# Altium PCB Sensor_Glove-X02.PcbDoc (part 1 of 3)
Units mil, origin at the board's own origin, x right, y up, seen from the top; angles counter-clockwise.
Board outline 1190 x 1020 mil, 2 copper layers (Top Layer, Bottom Layer), stack 5.556 mil thick; 101 components, 52 nets, 320 pads, 71 vias.
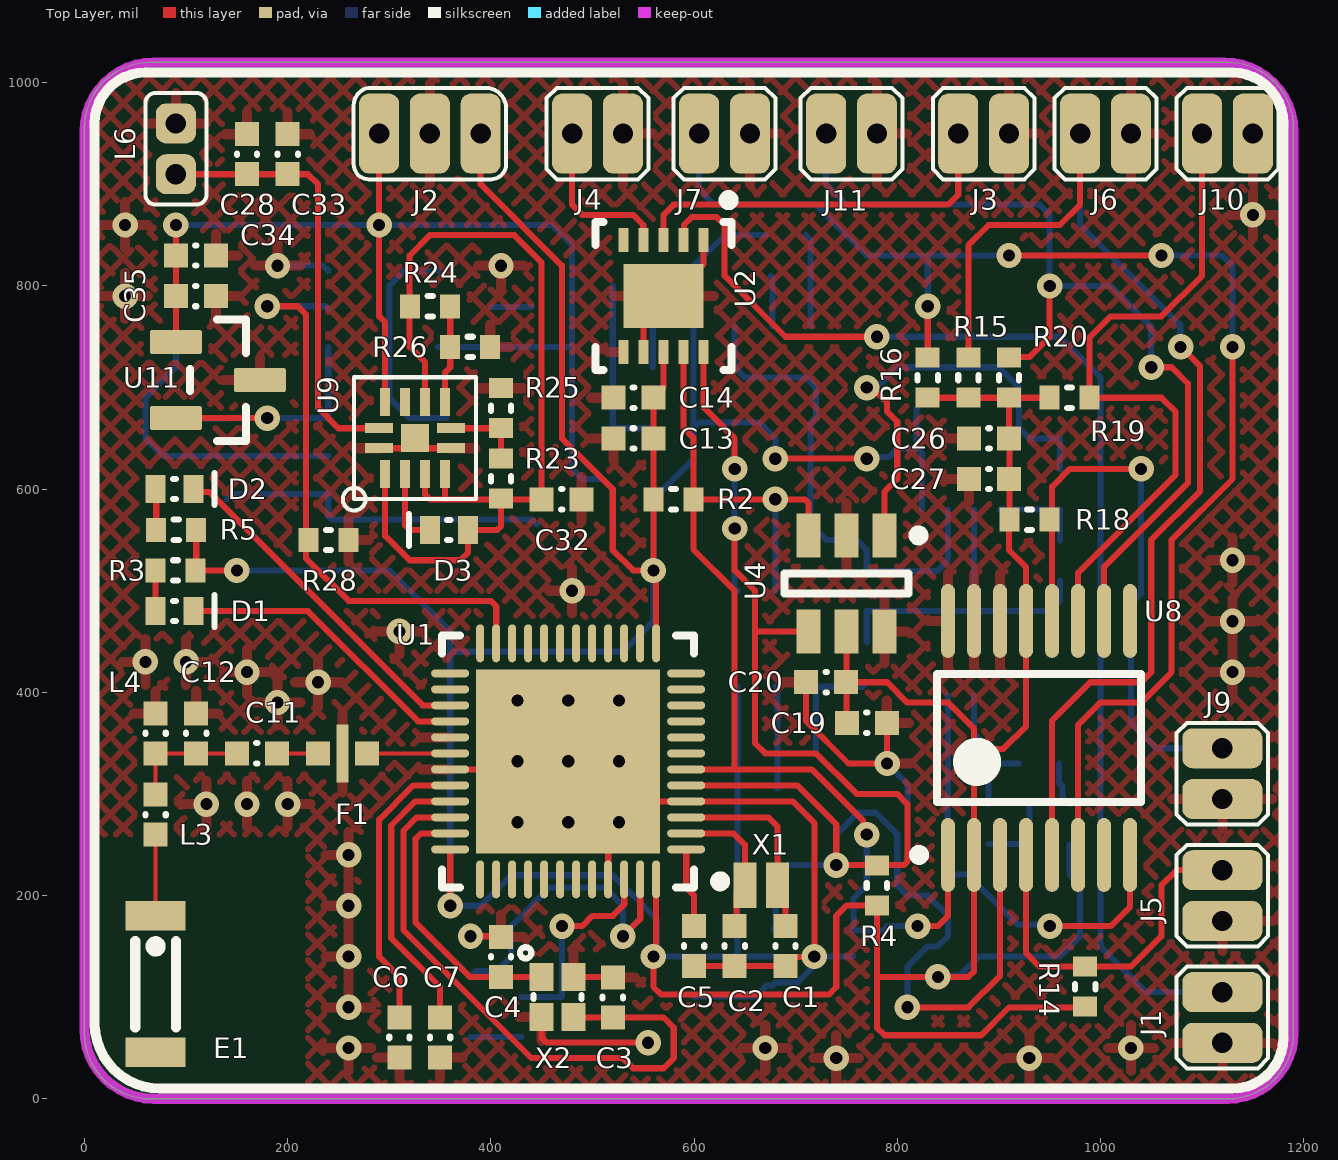
[diagram p0: Top Layer view]
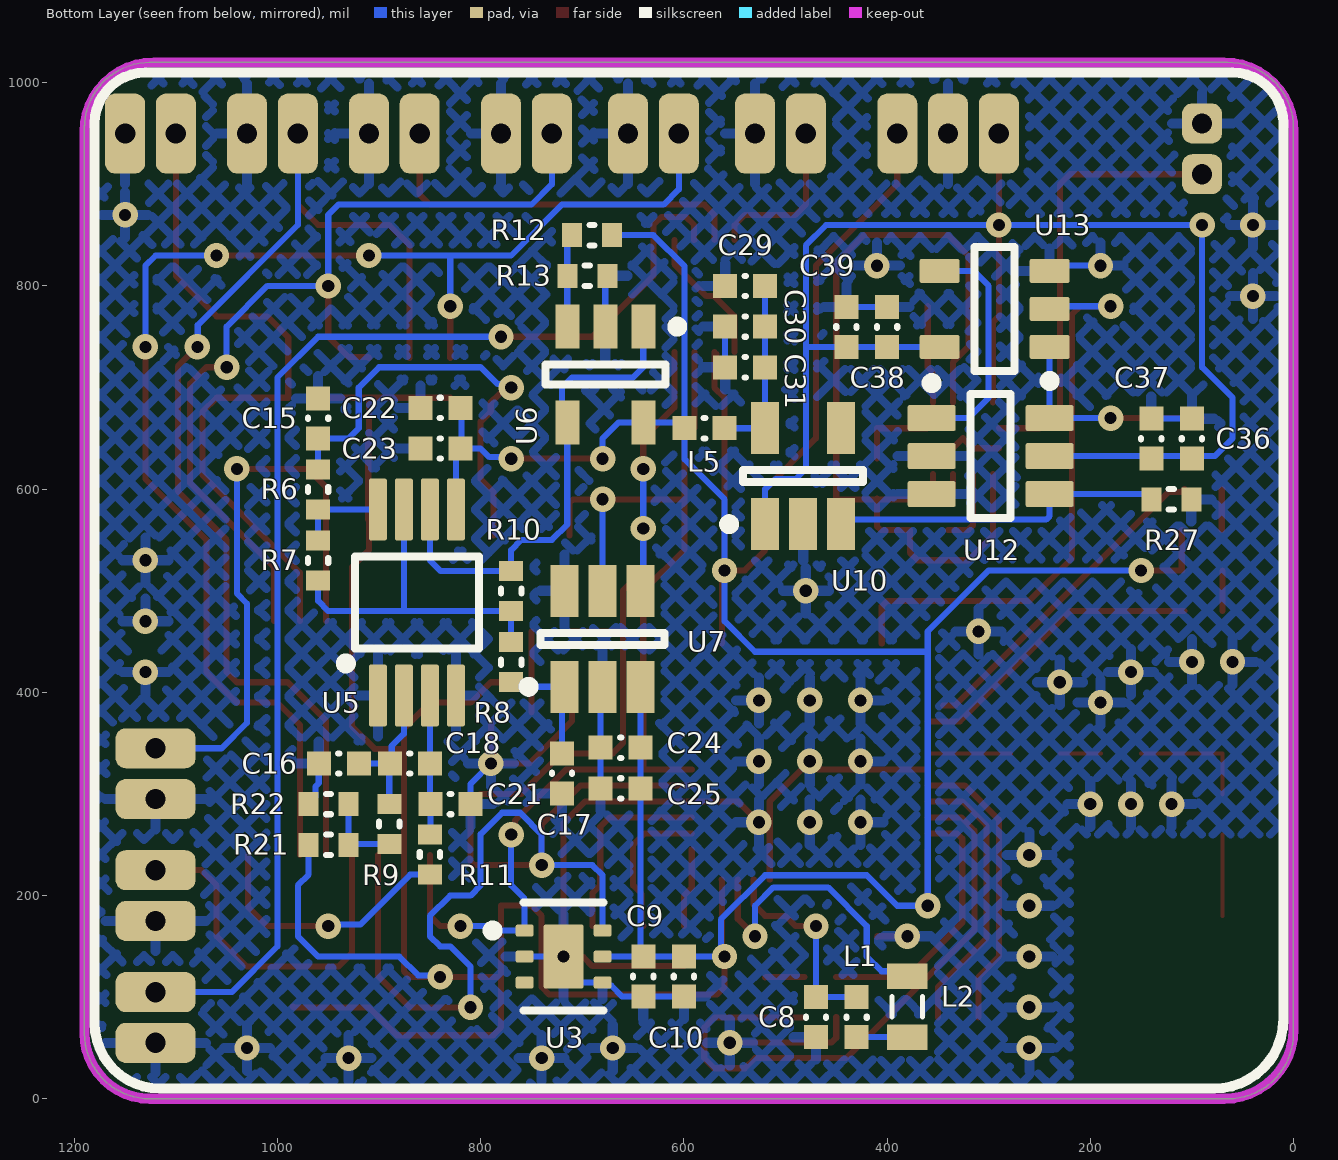
[diagram p1: Bottom Layer view, seen from below]
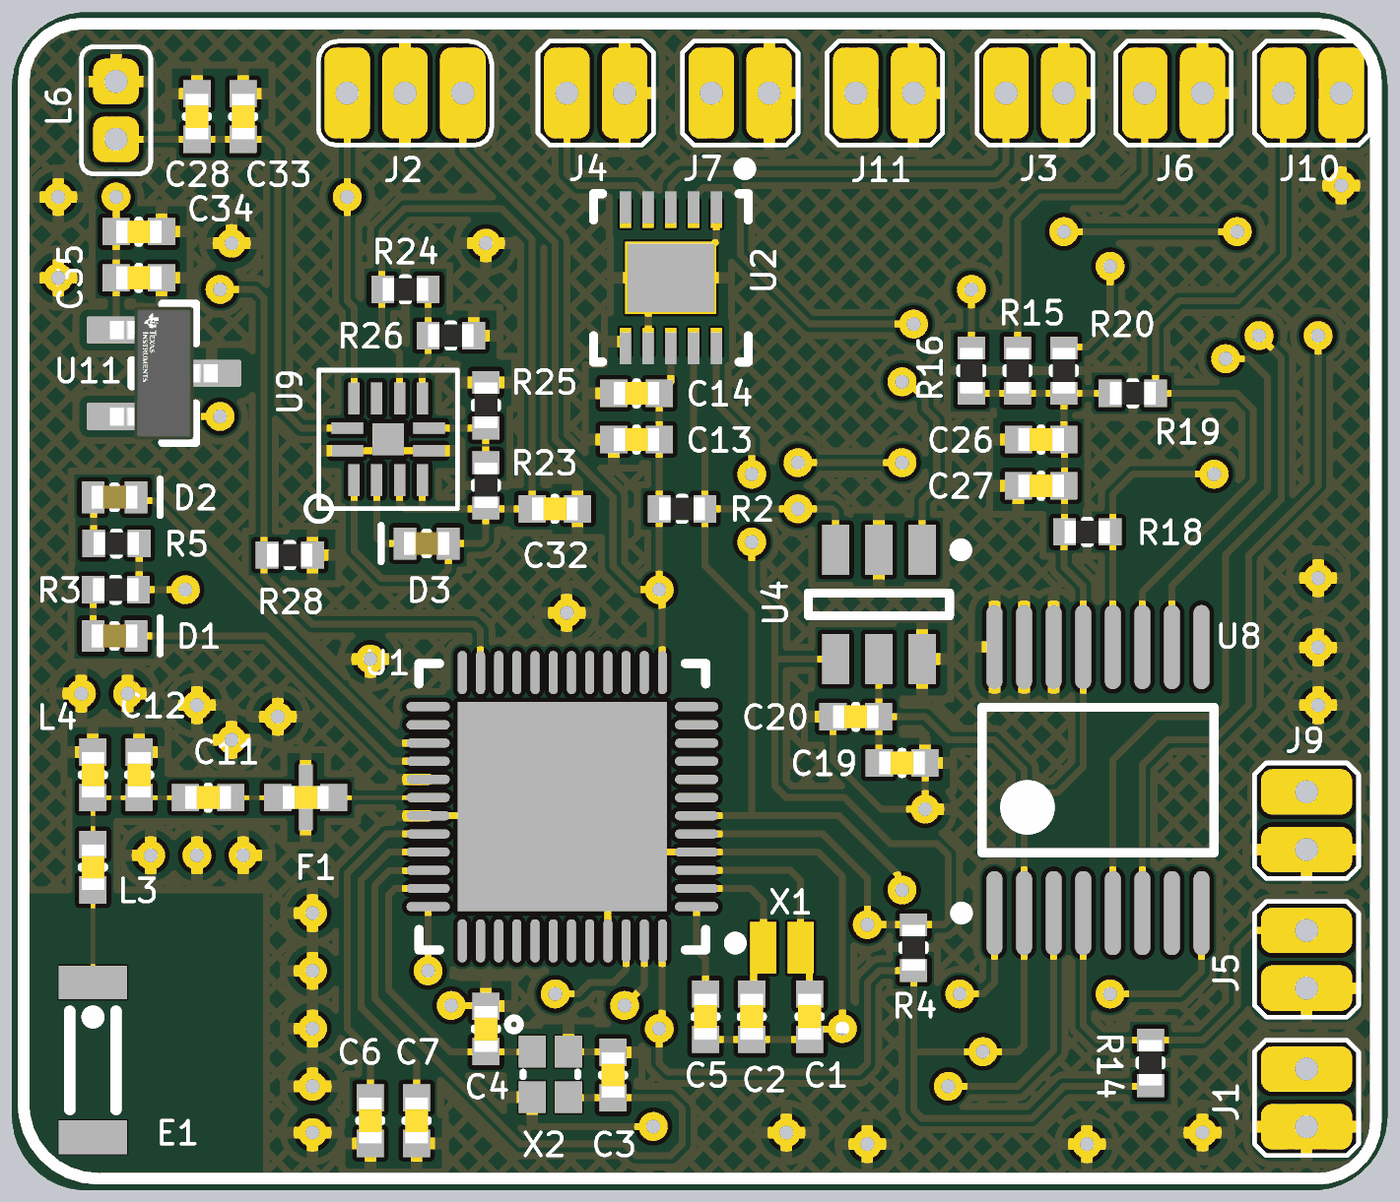
[diagram p2: 3D render of the assembled board from above, using the file's embedded part models]
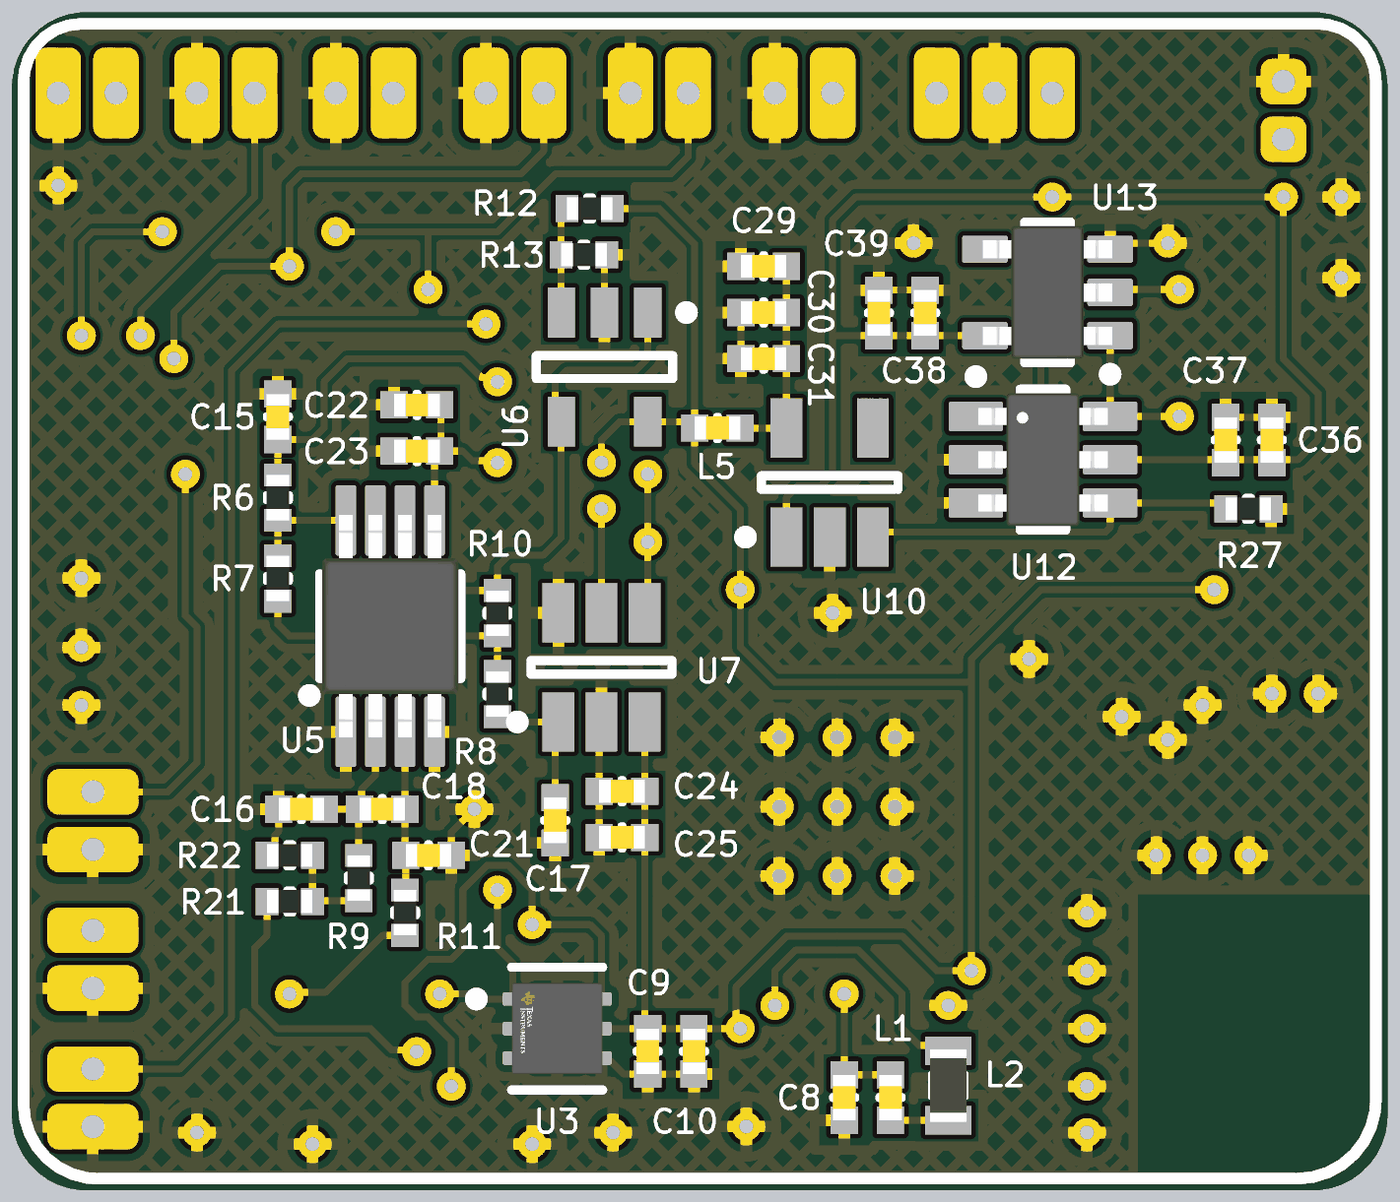
[diagram p3: 3D render of the assembled board from below, using the file's embedded part models]

## Layer stack, top to bottom
Top Solder: solder mask 1, SM-001, Dk 4
Top Layer: signal copper 1.378
Dielectric 2: prepreg 2.8, PP-006, Dk 4.1
Bottom Layer: signal copper 1.378
Bottom Solder: solder mask 1, SM-001, Dk 4

## Board outline
0,64.49 0,955.51 cw(c64.49,955.51) 64.49,1020 1125.51,1020 cw(c1125.51,955.51) 1190,955.51 1190,64.49 cw(c1125.51,64.49) 1125.51,0 64.49,0 cw(c64.49,64.49)

## Design rules (kind name [scope] priority, off if disabled: settings)
Clearance [All] p1: gap=6 ignorepadtopadclearanceinfootprint=FALSE except(4: Arc-Arc Arc-Track Arc-Fill Arc-Poly Arc-Region Track-Track Track-Fill Track-Poly Track-Region Fill-Fill Fill-Poly Fill-Region Poly-Poly Poly-Region Region-Region)
ComponentClearance [All] p1: gap=15 collisioncheckmode=3 verticalgap=0 showdistances=FALSE
HoleSize [All] p1: absolutevalues=TRUE maxlimit=200 minlimit=12 maxpercent=80.000 minpercent=20.000
MinimumSolderMaskSliver [All] p1: minsoldermaskwidth=6
PolygonConnect [All] p1: connectstyle=Relief reliefconductorwidth=10 reliefentries=4 polygonreliefangle="90 Angle" airgapwidth=10
RoutingVias [All] p1: holewidth=16 width=30 viastyle="Through Hole" minholewidth=12 minwidth=12 maxholewidth=100 maxwidth=50
SilkToSilkClearance [All] p1: silktosilkclearance=6
SilkToSolderMaskClearance [IsPad] p1: minsilkscreentomaskgap=6 clearancetoexposedcopper=TRUE
SolderMaskExpansion [All] p1: expansion=4 istentingtop=FALSE
UnRoutedNet [All] p1: checkbadconnections=TRUE
Width [All] p1: maxlimit=50 minlimit=4 preferedwidth=6
24 further rules are at their usual default settings.

## Classes and differential pairs
component class Sensor_Glove_Pheripherals-X02: C13 C14 J1 J3 J4 U2 U3
component class Sensor_Glove_Sensors-X02: C15 C16 C17 C18 C19 C20 C21 C22 C23 C24 C25 C26 C27 J5 J6 J7 J9 J10 J11 R6 R7 R8 R9 R10 R11 R12 R13 R14 R15 R16 R18 R19 R20 R21 R22 U4 U5 U6 U7 U8
component class Sensor_Glove_Power-X02: C28 C29 C30 C31 C32 C33 C34 C35 C36 C37 C38 C39 D3 J2 L5 L6 R23 R24 R25 R26 R27 R28 U9 U10 U11 U12 U13
component class Sensor_Glove_Main-X02: C1 C2 C3 C4 C5 C6 C7 C8 C9 C10 C11 C12 D1 D2 E1 F1 L1 L2 L3 L4 R2 R3 R4 R5 U1 X1 X2

## Components (designator, comment, footprint, x,y, rotation, side; value= is the part's Value field where it differs from the comment)
C1 "14pF" C0402 690,150.31 r90 top
C2 "14pF" C0402 640,150.31 r90 top
C3 "12pF" C0402 520,99.69 r90 top
C4 "12pF" C0402 410,139.69 r90 top
C5 "100nF" C0402 600,150.31 r270 top
C6 "100pF" C0402 310,60.31 r270 top
C7 "100pF" C0402 350,60.31 r270 top
C8 "1uF" C0402 470,80.31 r90 bottom
C9 "4.7uF" C0402 640,120.31 r270 bottom
C10 "100nF" C0402 600,120.31 r90 bottom
C11 "1pF" C0402 169.69,340 r180 top
C12 "" C0402 110,359.69 r90 top
C13 "1uF" C0402 540.32,650 r180 top
C14 "100nF" C0402 540.32,690 r180 top
C15 "100nF" C0402 960,669.68 r90 bottom
C16 "" C0402 939.68,330 r180 bottom
C17 "1uF" C0402 720,320.31 r270 bottom
C18 "100nF" C0402 869.68,330 r180 bottom
C19 "1uF" C0402 770,370 r0 top
C20 "100nF" C0402 730,410 r180 top
C21 "" C0402 829.68,290 r180 bottom
C22 "1uF" C0402 839.68,680 r0 bottom
C23 "100nF" C0402 839.68,640 r0 bottom
C24 "1uF" C0402 662.28,345.51 r0 bottom
C25 "100nF" C0402 662.28,305.51 r0 bottom
C26 "1uF" C0402 890.32,650 r180 top
C27 "100nF" C0402 890.32,610 r180 top
C28 "47nF" C0402 160,929.68 r90 top
C29 "10uF" C0402 539.68,800 r0 bottom
C30 "1uF" C0402 539.68,760 r0 bottom
C31 "100nF" C0402 539.68,720 r180 bottom
C32 "4.7uF" C0402 469.69,590 r0 top
C33 "6.8nF" C0402 200,929.68 r90 top
C34 "1uF" C0402 109.69,830 r0 top
C35 "100nF" C0402 109.69,790 r180 top
C36 "1uF" C0402 100,649.68 r90 bottom
C37 "100nF" C0402 140,649.68 r270 bottom
C38 "1uF" C0402 400,759.68 r90 bottom
C39 "100nF" C0402 440,759.68 r270 bottom
D1 "Orange" LED_0402 88.7,480 r0 top
D2 "Red" LED_0402 88.7,600 r0 top
D3 "Yellow" LED_0402 358.7,560 r180 top
E1 "2450AT18B100" 2450AT18B100 70,180 r270 top
F1 "2450FM07A0029" 2450FM07A0029 254.11,340 r180 top
J1 "Sensor Interconnect Pads" Sensor_Interconnect_Pad 1120,80 r270 top
J2 "SMD CONNECTOR FOR 40 mAh BATTERY" BATTERY_CONNECTOR 340,950 r0 top
J3 "Sensor Interconnect Pads" Sensor_Interconnect_Pad 885,950 r0 top
J4 "Sensor Interconnect Pads" Sensor_Interconnect_Pad 505,950 r0 top
J5 "Sensor Interconnect Pads" Sensor_Interconnect_Pad 1120,200 r90 top
J6 "Sensor Interconnect Pads" Sensor_Interconnect_Pad 1005,950 r180 top
J7 "Sensor Interconnect Pads" Sensor_Interconnect_Pad 630,950 r180 top
J9 "Sensor Interconnect Pads" Sensor_Interconnect_Pad 1120,320 r90 top
J10 "Sensor Interconnect Pads" Sensor_Interconnect_Pad 1125,950 r180 top
J11 "Sensor Interconnect Pads" Sensor_Interconnect_Pad 755,950 r180 top
L1 "15nH" L0402 430,80.31 r270 bottom
L2 "10uH" L0603 380,90.63 r90 bottom
L3 "0.0039uH" L0402 70,279.69 r270 top
L4 "0.0027uH" L0402 70,359.69 r270 top
L5 "1uH" L0402 579.68,660 r0 bottom
L6 "WIRELESS CHARGING COIL, RECEIVER" 760308101219 90,935 r90 top
R2 "3.3kR" R0402 579.68,590 r0 top
R3 "422R" R0402 89.69,520 r180 top
R4 "3.3kR" R0402 780,210 r90 top
R5 "422R" R0402 90.31,560 r180 top
R6 "0mR" R0402 960,599.68 r90 bottom
R7 "" R0402 960,529.68 r90 bottom
R8 "0mR" R0402 770,429.69 r270 bottom
R9 "0mR" R0402 890,270.31 r90 bottom
R10 "" R0402 770,499.69 r270 bottom
R11 "0mR" R0402 850,240.31 r90 bottom
R12 "100kR" R0402 690.32,850 r0 bottom
R13 "100kR" R0402 695.12,810 r180 bottom
R14 "" R0402 985,110.31 r90 top
R15 "" R0402 870,709.68 r90 top
R16 "" R0402 830,709.68 r90 top
R18 "" R0402 930.32,570 r0 top
R19 "" R0402 969.68,690 r0 top
R20 "" R0402 910,709.68 r90 top
R21 "" R0402 949.68,250 r180 bottom
R22 "" R0402 949.68,290 r0 bottom
R23 "0R" R0402 410,610.32 r90 top
R24 "0R" R0402 340.31,780 r180 top
R25 "0R" R0402 410,679.68 r90 top
R26 "0R" R0402 379.69,740 r0 top
R27 "1MR" R0402 120.31,590 r180 bottom
R28 "1MR" R0402 240.31,550 r180 top
U1 "NRF52832-QFAA-R7" NRF52832-QFAA-R7 476.14,332.13 r0 top
U2 "4 CHANNEL CDC" "WSON-10 3X3MM" 570,790 r270 top
U3 "TMP117AIDRVR" TMP117AIDRVR 718.39,140 r270 bottom
U4 "ADS1100A1IDBVT" TI-DBV6_N 750,507.24 r270 top
U5 "Instrumentation Amplifier" 8-MSOP 862.8,488.46 r90 bottom
U6 "AD8505ARJZ-R7" ADI-RJ-5_N 677.4,712.76 r270 bottom
U7 "DAC5571IDBVT" TI-DBV6_M 680,452.76 r90 bottom
U8 "ADG728BRUZ" ADI-RU-16_M 939.57,355.16 r90 top
U9 "LTC4124" 12-LQFN 325.43,650.16 r90 top
U10 "S-1318A30-M5T1U4" SOT-23-5 482.6,612.76 r90 bottom
U11 "DRV5032FBDBZR" FP-DBZ0003A-MFG 131.34,707.4 r0 top
U12 "SN74LVC1G57DBVR" DBV0006A_M 298.07,632.6 r180 bottom
U13 "SN74LVC1G80DBVR" DBV0005A_N 294.13,777.4 r0 bottom
X1 "32.768 kHz" CRYSTAL_1MM2_X_1MM0 666.14,210 r180 top
X2 "32MHz" CRYSTAL_1MM6_X_1MM2 465.75,100.31 r270 top

## Footprints (in the part's own frame and the unit in brackets; to place one, negate y for a bottom-side part, rotate by r counter-clockwise, add the part's x,y. Pads: shape width x height; smd on the part's side, far side on the other; paste and mask are expansions set on the pad)
8-MSOP [mm] "TSOP, 8-Leads, Body 3.1x3.1mm, Pitch 0.65mm, IPC Low Density"
  rrect22% 1.55x0.45 smd: 1(-2.325,0.975) 2(-2.325,0.325) 3(-2.325,-0.325) 4(-2.325,-0.975) 5(2.325,-0.975) 6(2.325,-0.325) 7(2.325,0.325) 8(2.325,0.975)
  silkscreen extent -1.65,-1.55 1.15,1.9, body extent -2.45,-1.5 2.45,1.5, height 0.94
12-LQFN [mm] "12-LQFN Exposed Pad"
  rect 0.7x0.25 smd: 1(-0.9,0.75) 2(-0.9,0.25) 3(-0.9,-0.25) 4(-0.9,-0.75) 7(0.9,-0.75) 8(0.9,-0.25) 9(0.9,0.25) 10(0.9,0.75)
  rect 0.25x0.7 smd: 5(-0.25,-0.9) 6(0.25,-0.9) 11(0.25,0.9) 12(-0.25,0.9)
  rect 0.7x0.7 smd: 13(0,0)
  silkscreen extent -1.81,-1.52 1.52,1.81, body extent -1.02,-1.02 1.02,1.02, height 0.25
2450AT18B100 [mm] "2.4GHz Mini Antenna SMD, 50 ohm Resistence"
  rect 0.74x1.5 smd mask+0.03: 1(0,0) 2(3.406,0)
  silkscreen extent 0.63,-0.51 2.79,0.51, body extent -0.05,-0.9 3.35,0.9, height 1.4
2450FM07A0029 [mm] "Ultra Miniature 2.45 GHz Impedance Matched Low Pass Filter for nRF52832"
  rect 0.6x0.6 smd: 1(-0.613,0) 2(0.613,0)
  rect 0.3x1.45 smd: 3(0,0)
  body extent -0.5,-0.25 0.5,0.25, height 0.55
760308101219 [mm] "WE-WPCC WIRELESS POWER TRANSFER RECEIVER COIL"
  rrect50% 1x1 hole 0.508: 1(-0.635,0) 2(0.635,0)
  silkscreen extent -1.4,-0.76 1.4,0.76
ADI-RJ-5_N [mm] "SOT-23, 5-Leads, Body 2.9x1.6mm, Pitch 0.95mm, IPC Medium Density"
  rect 1.1x0.6 smd: 1(-1.2,0.95) 2(-1.2,0) 3(-1.2,-0.95) 4(1.2,-0.95) 5(1.2,0.95)
  silkscreen extent -1.32,-1.5 0.25,1.92, body extent -0.85,-1.5 0.85,1.5, height 1.45
ADI-RU-16_M [mm] "SOP, 16-Leads, Body 5x4.4mm, Pitch 0.65mm, IPC Low Density"
  oval 1.85x0.35 smd: 1(-2.925,2.275) 2(-2.925,1.625) 3(-2.925,0.975) 4(-2.925,0.325) 5(-2.925,-0.325) 6(-2.925,-0.975) 7(-2.925,-1.625) 8(-2.925,-2.275) 9(2.925,-2.275) 10(2.925,-1.625) 11(2.925,-0.975) 12(2.925,-0.325) 13(2.925,0.325) 14(2.925,0.975) 15(2.925,1.625) 16(2.925,2.275)
  silkscreen extent -3.05,-2.55 1.6,3.12, body extent -2.25,-2.55 2.25,2.55, height 1.2
BATTERY_CONNECTOR [mm] "SMD Battery connector"
  rrect50% 1x2 hole 0.508: 1(-1.27,0) 2(0,0) 3(1.27,0)
  silkscreen extent -1.91,-1.14 1.91,1.14
C0402 [mm]
  rect 0.6x0.6 smd: 1(-0.5,0) 2(0.5,0)
  silkscreen extent -0.02,-0.25 0.02,0.25, body extent -0.5,-0.25 0.5,0.25, height 0.55
CRYSTAL_1MM2_X_1MM0 [mm] "Crystal 1.2 x 1.0 x 0.35mm"
  rect 0.575x1.14 smd paste-0.5 mask+0.06: 1(-0.41,0) 2(0.41,0)
  body extent -0.6,-0.5 0.6,0.5, height 0.35
CRYSTAL_1MM6_X_1MM2 [mm] "1.6 x 1.2 x 0.35mm 4-pin crystal"
  rect 0.7x0.6 smd mask+0.036: 1(-0.5,-0.4) 2(0.5,-0.4) 3(0.5,0.4) 4(-0.5,0.4)
  silkscreen extent -1.24,-0.94 0.05,0.6, body extent -0.8,-0.6 0.8,0.6, height 0.35
DBV0005A_N [mm] "SOT23, 5-Leads, Body 3.05x1.75mm, Pitch 0.95mm, IPC Medium Density"
  rrect17% 1x0.6 smd: 1(-1.375,0.95) 2(-1.375,0) 3(-1.375,-0.95) 4(1.375,-0.95) 5(1.375,0.95)
  silkscreen extent -1.5,-1.55 0.5,1.92, body extent -1.42,-1.46 1.42,1.46, height 1.08
DBV0006A_M [mm] "SOT23, 6-Leads, Body 3.05x1.75mm, Pitch 0.95mm, IPC Low Density"
  rrect15% 1.2x0.65 smd: 1(-1.475,0.95) 2(-1.475,0) 3(-1.475,-0.95) 4(1.475,-0.95) 5(1.475,0) 6(1.475,0.95)
  silkscreen extent -1.6,-1.55 0.5,1.95, body extent -1.42,-1.46 1.42,1.46, height 1.11
FP-DBZ0003A-MFG [mm]
  rrect17% 1.3x0.6 smd paste+0 mask+0: 1(-1.05,0.95) 2(-1.05,-0.95) 3(1.05,0)
  silkscreen extent -0.7,-1.52 0.7,1.52, body extent -1.8,-1.62 1.8,1.62, height 0.25
L0402 [mm]
  rect 0.6x0.6 smd: 1(-0.5,0) 2(0.5,0)
  silkscreen extent -0.02,-0.25 0.02,0.25, body extent -0.5,-0.25 0.5,0.25, height 0.55
L0603 [mil] "surface mount inductor 0603"
  rect 25x40 smd: 1(-30,0) 2(30,0)
  silkscreen extent -10,-15 10,15, body extent -31,-16 32,16, height 39
LED_0402 [mm] "0402 w/ LED mark"
  rect 0.5x0.7 smd: A(-0.475,0) K(0.475,0)
  silkscreen extent -0.04,-0.4 1,0.4, body extent -0.5,-0.25 0.5,0.25, height 0.35
NRF52832-QFAA-R7 [mm]
  oval 0.95x0.2 smd: 1(2.95,-2.2) 2(2.95,-1.8) 3(2.95,-1.4) 4(2.95,-1) 5(2.95,-0.6) 6(2.95,-0.2) 7(2.95,0.2) 8(2.95,0.6) 9(2.95,1) 10(2.95,1.4) 11(2.95,1.8) 12(2.95,2.2) 25(-2.95,2.2) 26(-2.95,1.8) 27(-2.95,1.4) 28(-2.95,1) 29(-2.95,0.6) 30(-2.95,0.2) 31(-2.95,-0.2) 32(-2.95,-0.6) 33(-2.95,-1) 34(-2.95,-1.4) 35(-2.95,-1.8) 36(-2.95,-2.2)
  oval 0.2x0.95 smd: 13(2.2,2.95) 14(1.8,2.95) 15(1.4,2.95) 16(1,2.95) 17(0.6,2.95) 18(0.2,2.95) 19(-0.2,2.95) 20(-0.6,2.95) 21(-1,2.95) 22(-1.4,2.95) 23(-1.8,2.95) 24(-2.2,2.95) 37(-2.2,-2.95) 38(-1.8,-2.95) 39(-1.4,-2.95) 40(-1,-2.95) 41(-0.6,-2.95) 42(-0.2,-2.95) 43(0.2,-2.95) 44(0.6,-2.95) 45(1,-2.95) 46(1.4,-2.95) 47(1.8,-2.95) 48(2.2,-2.95)
  rect 4.6x4.6 smd: 49(0,0)
  silkscreen extent -3.15,-3.15 3.92,3.15, body extent -3,-3 3,3, height 0.9
R0402 [mm]
  rect 0.5x0.6 smd: 1(-0.5,0) 2(0.5,0)
  silkscreen extent -0.06,-0.25 0.06,0.25, body extent -0.5,-0.25 0.5,0.25, height 0.35
Sensor_Interconnect_Pad [mm] "Solder PAD for sensor interconnects"
  rrect50% 1x2 hole 0.508: 1(-0.635,0) 2(0.635,0)
  silkscreen extent -1.27,-1.14 1.27,1.14
SOT-23-5 [mm] "SOT23, 5-Leads, Body 2.9x1.6mm, Pitch 0.95mm, Lead Span 2.8mm, IPC Low Density"
  rect 1.3x0.7 smd: 1(-1.2,0.95) 2(-1.2,0) 3(-1.2,-0.95) 4(1.2,-0.95) 5(1.2,0.95)
  silkscreen extent -1.32,-1.5 0.15,1.98, body extent -0.83,-1.49 0.83,1.5, height 1.19
TI-DBV6_M [mm] "SOT23, 6-Leads, Body 2.9x1.6mm, Pitch 0.95mm, IPC Low Density"
  rect 1.3x0.7 smd: 1(-1.2,0.95) 2(-1.2,0) 3(-1.2,-0.95) 4(1.2,-0.95) 5(1.2,0) 6(1.2,0.95)
  silkscreen extent -1.32,-1.55 0.15,1.98, body extent -0.87,-1.52 0.87,1.53, height 1.45
TI-DBV6_N [mm] "SOT23, 6-Leads, Body 2.9x1.6mm, Pitch 0.95mm, IPC Medium Density"
  rect 1.1x0.6 smd: 1(-1.2,0.95) 2(-1.2,0) 3(-1.2,-0.95) 4(1.2,-0.95) 5(1.2,0) 6(1.2,0.95)
  silkscreen extent -1.32,-1.55 0.25,1.93, body extent -0.87,-1.52 0.87,1.53, height 1.45
TMP117AIDRVR [mm]
  rrect33% 0.3x0.45 smd paste+0 mask+0: 1(-0.65,-0.975) 2(0,-0.975) 3(0.65,-0.975) 4(0.65,0.975) 5(0,0.975) 6(-0.65,0.975)
  rrect10% 1.6x1 smd paste-1000 mask+0: 7(0,0)
  silkscreen extent -1.35,-1.9 1.35,1, body extent -1,-1 1,1, height 0.8
"WSON-10 3X3MM" [mm] "SON, 10-Leads, Body 3x3 mm, Pitch 0.5mm"
  rect 0.6x0.25 smd paste-0.125 mask+0.051: 1(-1.4,1) 2(-1.4,0.5) 3(-1.4,0) 4(-1.4,-0.5) 5(-1.4,-1) 6(1.4,-1) 7(1.4,-0.5) 8(1.4,0) 9(1.4,0.5) 10(1.4,1)
  rect 1.6x2 smd paste-0.05 mask+0.051: 1(0,0)
  silkscreen extent -2.52,-1.7 1.85,1.75, body extent -1.55,-1.55 1.55,1.55, height 0.8

## Part data
C1 C2: library part C-0402(1005), "Ceramic Capacitor, Multilayer, Ceramic, 50V, 1% +Tol, 1% -Tol, C0G, 30ppm/Cel TC, 0.000014uF, Surface Mount, 0402", Case Code (Imperial)=0402, Case Code (Metric)=1005, Dielectric=C0G, Manufacturer="Kyocera AVX", Manufacturer Part Number=04025U140FAT2A, Max Operating Temperature=125°C, Min Operating Temperature=-55°C, Package Quantity=10000, Supplier Part Number 1=478-10139-1-ND, Tolerance=1%, Voltage Rating=50V, Capacitance=14pF, Case/Package=0402, Category="Ceramic Capacitors", ComponentLink1Description=https://datasheet.ciiva.com/169/product-169683.pdf, ComponentLink1URL=https://datasheet.ciiva.com/169/product-169683.pdf, ComponentLink2Description=https://datasheet.ciiva.com:443/pdfs/VipMasterIC/IC/AVXC/AVXC-S-A0001948465/AVXC-S-A0001948465-1.pdf?src-supplier=IHS+Markit, ComponentLink2URL=https://datasheet.ciiva.com:443/pdfs/VipMasterIC/IC/AVXC/AVXC-S-A0001948465/AVXC-S-A0001948465-1.pdf?src-supplier=IHS+Markit, ComponentLink3Description=https://datasheet.ciiva.com/6269/useries-6269558.pdf?src-supplier=Digi-Key, ComponentLink3URL=https://datasheet.ciiva.com/6269/useries-6269558.pdf?src-supplier=Digi-Key, ComponentLink4Description=https://datasheet.ciiva.com/11568/useries-11568551.pdf?src-supplier=Avnet, ComponentLink4URL=https://datasheet.ciiva.com/11568/useries-11568551.pdf?src-supplier=Avnet, Composition=Ceramic, Depth=0.5mm, Length=1mm, Mount="Surface Mount", Packaging="Tape and Reel", Pricing 1="1=0.35000, 10=0.24100, 100=0.14460, 500=0.10846, 1000=0.09158, 2500=0.08676, 5000=0.08194 (USD)", Radiation Hardening=No, RoHS=Yes, Stock 1=25036, Supplier 1=Digi-Key, Termination=SMD/SMT, Thickness=0.022inch, Voltage Rating (DC)=50V, Width=0.5mm
C3 C4: library part C-0402(1005), "Ceramic Capacitor, Multilayer, Ceramic, 50V, 1% +Tol, 1% -Tol, C0G, 30ppm/Cel TC, 0.000012uF, Surface Mount, 0402", Case Code (Imperial)=0402, Case Code (Metric)=1005, Dielectric=C0G, Manufacturer="Kyocera AVX", Manufacturer Part Number=04025U120FAT2A, Max Operating Temperature=125°C, Min Operating Temperature=-55°C, Package Quantity=10000, Supplier Part Number 1=478-10136-1-ND, Tolerance=1%, Voltage Rating=50V, Capacitance=12pF, Case/Package=0402, Category="Ceramic Capacitors", ComponentLink1Description=https://datasheet.ciiva.com/169/product-169683.pdf, ComponentLink1URL=https://datasheet.ciiva.com/169/product-169683.pdf, ComponentLink2Description=https://datasheet.ciiva.com:443/pdfs/VipMasterIC/IC/AVXC/AVXC-S-A0008668660/AVXC-S-A0008668660-1.pdf?src-supplier=IHS+Markit, ComponentLink2URL=https://datasheet.ciiva.com:443/pdfs/VipMasterIC/IC/AVXC/AVXC-S-A0008668660/AVXC-S-A0008668660-1.pdf?src-supplier=IHS+Markit, ComponentLink3Description=https://datasheet.ciiva.com/16327/useries-16327642.pdf?src-supplier=Future+Electronics, ComponentLink3URL=https://datasheet.ciiva.com/16327/useries-16327642.pdf?src-supplier=Future+Electronics, ComponentLink4Description=https://datasheet.ciiva.com/11568/useries-11568940.pdf?src-supplier=Avnet, ComponentLink4URL=https://datasheet.ciiva.com/11568/useries-11568940.pdf?src-supplier=Avnet, Composition=Ceramic, Depth=0.5mm, Height=0.02mm, Lead Free="Lead Free", Length=1mm, Mount="Surface Mount", Packaging="Tape and Reel", Pricing 1="1=0.33000, 10=0.22700, 100=0.13630, 500=0.10220, 1000=0.08630, 2500=0.08176, 5000=0.07721 (USD)", Radiation Hardening=No, RoHS=Yes, Stock 1=30880, Supplier 1=Digi-Key, Termination=SMD/SMT, Thickness=0.022inch, Voltage Rating (DC)=50V, Weight=2.3E-05oz, Width=0.02inch
C5 C31 C35 C37 C39: library part C-0402(1005), "Ceramic Capacitor, Multilayer, Ceramic, 25V, 10% +Tol, 10% -Tol, X5R, 15% TC, 0.1uF, Surface Mount, 0402", Case Code (Imperial)=0402, Case Code (Metric)=1005, Dielectric=X5R, Manufacturer="Taiyo Yuden", Manufacturer Part Number=TMK105BJ104KV-F, Max Operating Temperature=85°C, Min Operating Temperature=-55°C, Package Quantity=1, Supplier Part Number 1=587-1456-1-ND, Tolerance=10%, Voltage=25V, Capacitance=100nF, Case/Package=0402, Category="Ceramic Capacitors", ComponentLink1Description=https://datasheet.ciiva.com/169/product-169683.pdf, ComponentLink1URL=https://datasheet.ciiva.com/169/product-169683.pdf, ComponentLink2Description=https://datasheet.ciiva.com:443/pdfs/VipMasterIC/IC/TAIY/TAIY-S-A0009103435/TAIY-S-A0009103038-1.pdf?src-supplier=IHS+Markit, ComponentLink2URL=https://datasheet.ciiva.com:443/pdfs/VipMasterIC/IC/TAIY/TAIY-S-A0009103435/TAIY-S-A0009103038-1.pdf?src-supplier=IHS+Markit, ComponentLink3Description=https://datasheet.ciiva.com/30051/25tmk105bj104kv-f-30051094.pdf?src-supplier=Onlinecomponents.com, ComponentLink3URL=https://datasheet.ciiva.com/30051/25tmk105bj104kv-f-30051094.pdf?src-supplier=Onlinecomponents.com, ComponentLink4Description=https://datasheet.ciiva.com/15922/28tmk105bj104kv-f-15922315.pdf?src-supplier=Onlinecomponents.com, ComponentLink4URL=https://datasheet.ciiva.com/15922/28tmk105bj104kv-f-15922315.pdf?src-supplier=Onlinecomponents.com, ComponentLink5Description=https://datasheet.ciiva.com/131/tmk105bj104kv-f-ss-131420.pdf?src-supplier=Digi-Key, ComponentLink5URL=https://datasheet.ciiva.com/131/tmk105bj104kv-f-ss-131420.pdf?src-supplier=Digi-Key, ComponentLink6Description=https://datasheet.ciiva.com/22768/1693457-22768649.pdf?src-supplier=Farnell, ComponentLink6URL=https://datasheet.ciiva.com/22768/1693457-22768649.pdf?src-supplier=Farnell, Composition=Ceramic, Depth=0.5mm, Halogen Free="Halogen Free", Height=0.5mm, Lead Free="Lead Free", Length=1mm, Mount="Surface Mount", Number of Pins=2, Packaging="Tape and Reel", Pricing 1="1=0.10000, 10=0.04600, 100=0.02050, 500=0.01464, 1000=0.01150, 2500=0.01045, 5000=0.00961 (USD)", REACH SVHC="No SVHC", RoHS=Yes, Stock 1=27456801, Supplier 1=Digi-Key, Termination=SMD/SMT, Thickness=0.022inch, Voltage Rating=25V, Voltage Rating (DC)=25V, Weight=2.3E-05oz, Width=0.5mm
C6 C7: library part C-0402(1005), "Ceramic Capacitor, Multilayer, Ceramic, 50V, 1% +Tol, 1% -Tol, C0G, 30ppm/Cel TC, 0.0001uF, Surface Mount, 0402", Case Code (Imperial)=0402, Case Code (Metric)=1005, Dielectric=C0G, Manufacturer=Yageo, Manufacturer Part Number=CC0402FRNPO9BN101, Max Operating Temperature=125°C, Min Operating Temperature=-55°C, Package Quantity=10000, Supplier Part Number 1=311-3329-1-ND, Tolerance=1%, Voltage Rating=50V, Capacitance=100pF, Case/Package=0402, Category="Ceramic Capacitors", ComponentLink1Description=https://datasheet.ciiva.com/169/product-169683.pdf, ComponentLink1URL=https://datasheet.ciiva.com/169/product-169683.pdf, ComponentLink2Description=https://datasheet.ciiva.com:443/pdfs/VipMasterIC/IC/YAGO/YAGO-S-A0009251638/YAGO-S-A0009251638-1.pdf?src-supplier=IHS+Markit, ComponentLink2URL=https://datasheet.ciiva.com:443/pdfs/VipMasterIC/IC/YAGO/YAGO-S-A0009251638/YAGO-S-A0009251638-1.pdf?src-supplier=IHS+Markit, ComponentLink3Description=http://www.mouser.com/ds/2/447/Yageo_UPY-GP_NP0_16V-to-50V_9-358835.pdf?src-supplier=Mouser, ComponentLink3URL=http://www.mouser.com/ds/2/447/Yageo_UPY-GP_NP0_16V-to-50V_9-358835.pdf?src-supplier=Mouser, ComponentLink4Description=http://components.arrow.com/part/dataview/0323_00775990?src-supplier=Arrow+Europe, ComponentLink4URL=http://components.arrow.com/part/dataview/0323_00775990?src-supplier=Arrow+Europe, ComponentLink5Description=http://www.yageo.com/NewPortal/yageodocoutput?fileName=/pdf/MLCC/UPY-GP_NP0_16V-to-50V_14.pdf&src-supplier=Digi-Key, ComponentLink5URL=http://www.yageo.com/NewPortal/yageodocoutput?fileName=/pdf/MLCC/UPY-GP_NP0_16V-to-50V_14.pdf&src-supplier=Digi-Key, ComponentLink6Description=http://www.yageo.com/documents/recent/UPY-GP_NP0_16V-to-50V_16.pdf?src-supplier=Digi-Key, ComponentLink6URL=http://www.yageo.com/documents/recent/UPY-GP_NP0_16V-to-50V_16.pdf?src-supplier=Digi-Key, ComponentLink7Description=http://www.yageo.com/documents/recent/UPY-GP_NP0_16V-to-50V_9.pdf?src-supplier=Future+Electronics, ComponentLink7URL=http://www.yageo.com/documents/recent/UPY-GP_NP0_16V-to-50V_9.pdf?src-supplier=Future+Electronics, Composition=Ceramic, Depth=0.5mm, Lead Free="Lead Free", Length=1mm, Mount="Surface Mount", Packaging="Tape and Reel", Pricing 1="1=0.11000, 10=0.08200, 100=0.03840, 500=0.02690, 1000=0.02228, 2500=0.02073, 5000=0.01897 (USD)", RoHS=Yes, Stock 1=22812, Supplier 1=Digi-Key, Termination=SMD/SMT, Thickness=0.022inch, Voltage Rating (DC)=50V, Width=0.02inch
C8 C30 C34 C36 C38: library part C-0402(1005), "Ceramic Capacitor, Multilayer, Ceramic, 6.3V, 20% +Tol, 20% -Tol, X5R, 15% TC, 1uF, Surface Mount, 0402", Case Code (Imperial)=0402, Case Code (Metric)=1005, Dielectric=X5R, Manufacturer=Yageo, Manufacturer Part Number=CC0402MRX5R5BB105, Max Operating Temperature=85°C, Min Operating Temperature=-55°C, Package Quantity=1, Supplier Part Number 1=311-1441-1-ND, Tolerance=20%, Voltage Rating=6.3V, Capacitance=1uF, Case/Package=0402, Category="Ceramic Capacitors", ComponentLink1Description=https://datasheet.ciiva.com/169/product-169683.pdf, ComponentLink1URL=https://datasheet.ciiva.com/169/product-169683.pdf, ComponentLink2Description=https://datasheet.ciiva.com:443/pdfs/VipMasterIC/IC/YAGO/YAGO-S-A0006851646/YAGO-S-A0006851646-1.pdf?src-supplier=IHS+Markit, ComponentLink2URL=https://datasheet.ciiva.com:443/pdfs/VipMasterIC/IC/YAGO/YAGO-S-A0006851646/YAGO-S-A0006851646-1.pdf?src-supplier=IHS+Markit, ComponentLink3Description=https://datasheet.ciiva.com/176/mlccorderingcode-176806.pdf?src-supplier=Digi-Key, ComponentLink3URL=https://datasheet.ciiva.com/176/mlccorderingcode-176806.pdf?src-supplier=Digi-Key, ComponentLink4Description=https://datasheet.ciiva.com/176/mlccorderingcode-176807.pdf?src-supplier=Digi-Key, ComponentLink4URL=https://datasheet.ciiva.com/176/mlccorderingcode-176807.pdf?src-supplier=Digi-Key, ComponentLink5Description=https://datasheet.ciiva.com/176/mlccorderingcode-176808.pdf?src-supplier=Digi-Key, ComponentLink5URL=https://datasheet.ciiva.com/176/mlccorderingcode-176808.pdf?src-supplier=Digi-Key, Composition=Ceramic, Depth=0.5mm, Dissipation Factor=10%, Halogen Free="Halogen Free", Height=0.5mm, Lead Free="Lead Free", Length=1mm, Mount="Surface Mount", Number of Pins=2, Packaging="Tape and Reel", Pricing 1="1=0.13000, 10=0.08900, 100=0.04200, 500=0.02946, 1000=0.02439, 2500=0.02270, 5000=0.02076 (USD)", RoHS=Yes, Stock 1=16697, Supplier 1=Digi-Key, Termination=SMD/SMT, Thickness=0.022inch, Voltage Rating (DC)=6.3V, Width=0.5mm
C9: library part C-0402(1005), "0402 10 V 4.7 uF ±20% Tolerance X5R Multilayer Ceramic Chip Capacitor", Case Code (Imperial)=0402, Case Code (Metric)=1005, Manufacturer=Murata, Manufacturer Part Number=GRM155R61A475MEAAD, Max Operating Temperature=85°C, Min Operating Temperature=-55°C, Supplier Part Number 1=490-14306-1-ND, Tolerance=20%, Voltage Rating=10V, Capacitance=4.7uF, Case/Package=0402, Category="Ceramic Capacitors", ComponentLink1Description=https://datasheet.ciiva.com/169/product-169683.pdf, ComponentLink1URL=https://datasheet.ciiva.com/169/product-169683.pdf, ComponentLink2Description=https://psearch.en.murata.com:443/capacitor/product/GRM155R61A475MEAA%23.pdf?src-supplier=IHS+Markit, ComponentLink2URL=https://psearch.en.murata.com:443/capacitor/product/GRM155R61A475MEAA%23.pdf?src-supplier=IHS+Markit, ComponentLink3Description=http://www.farnell.com/datasheets/2189109.pdf?src-supplier=Farnell, ComponentLink3URL=http://www.farnell.com/datasheets/2189109.pdf?src-supplier=Farnell, ComponentLink4Description=https://search.murata.co.jp/Ceramy/image/img/A01X/G101/ENG/GRM155R61A475MEAA-01.pdf?src-supplier=Digi-Key, ComponentLink4URL=https://search.murata.co.jp/Ceramy/image/img/A01X/G101/ENG/GRM155R61A475MEAA-01.pdf?src-supplier=Digi-Key, ComponentLink5Description=http://www.farnell.com/datasheets/2189109.pdf?src-supplier=Element14, ComponentLink5URL=http://www.farnell.com/datasheets/2189109.pdf?src-supplier=Element14, ComponentLink6Description=http://www.farnell.com/datasheets/2189109.pdf?src-supplier=Newark, ComponentLink6URL=http://www.farnell.com/datasheets/2189109.pdf?src-supplier=Newark, ComponentLink7Description=http://datasheet.octopart.com/GRM155R61A475MEAAD-Murata-datasheet-138740730.pdf?src-supplier=Ciiva+Crawler, ComponentLink7URL=http://datasheet.octopart.com/GRM155R61A475MEAAD-Murata-datasheet-138740730.pdf?src-supplier=Ciiva+Crawler, ComponentLink8Description=http://datasheet.octopart.com/GRM155R61A475MEAAD-Murata-datasheet-140690084.pdf?src-supplier=Ciiva+Crawler, ComponentLink8URL=http://datasheet.octopart.com/GRM155R61A475MEAAD-Murata-datasheet-140690084.pdf?src-supplier=Ciiva+Crawler, ComponentLink9Description=http://datasheet.octopart.com/GRM155R61A475MEAAD-Murata-datasheet-68589269.pdf?src-supplier=Newark, ComponentLink9URL=http://datasheet.octopart.com/GRM155R61A475MEAAD-Murata-datasheet-68589269.pdf?src-supplier=Newark, ComponentLink10Description=http://datasheet.octopart.com/GRM155R61A475MEAAD-Murata-datasheet-8819587.pdf, ComponentLink10URL=http://datasheet.octopart.com/GRM155R61A475MEAAD-Murata-datasheet-8819587.pdf, ComponentLink11Description=http://datasheet.octopart.com/GRM155R61A475MEAAD-Murata-datasheet-10025737.pdf, ComponentLink11URL=http://datasheet.octopart.com/GRM155R61A475MEAAD-Murata-datasheet-10025737.pdf, ComponentLink12Description=http://datasheet.octopart.com/GRM155R61A475MEAAD-Murata-datasheet-11978611.pdf, ComponentLink12URL=http://datasheet.octopart.com/GRM155R61A475MEAAD-Murata-datasheet-11978611.pdf, ComponentLink13Description=http://datasheet.octopart.com/GRM155R61A475MEAAD-Murata-datasheet-12510076.pdf, ComponentLink13URL=http://datasheet.octopart.com/GRM155R61A475MEAAD-Murata-datasheet-12510076.pdf, ComponentLink14Description=http://datasheet.octopart.com/GRM155R61A475MEAAD-Murata-datasheet-12515295.pdf, ComponentLink14URL=http://datasheet.octopart.com/GRM155R61A475MEAAD-Murata-datasheet-12515295.pdf, Mount="Surface Mount", Packaging="Tape and Reel", Pricing 1="1=0.25000, 10=0.16900, 100=0.08560, 500=0.05854, 1000=0.05179, 2500=0.04954, 5000=0.04503 (USD)", Stock 1=420733, Supplier 1=Digi-Key
C10 C14 C15 C18 C20 C23 C25 C27: library part C-0402(1005), "Ceramic Capacitor, Multilayer, Ceramic, 25V, 10% +Tol, 10% -Tol, X5R, 15% TC, 0.1uF, Surface Mount, 0402", Case Code (Imperial)=0402, Case Code (Metric)=1005, Dielectric=X5R, Manufacturer="Taiyo Yuden", Manufacturer Part Number=TMK105BJ104KV-F, Max Operating Temperature=85°C, Min Operating Temperature=-55°C, Package Quantity=1, Resistor Type=Ceramic, Supplier Part Number 1=587-1456-1-ND, Tolerance=10%, Voltage=25V, Capacitance=100nF, Case/Package=0402, Category="Ceramic Capacitors", ComponentLink1Description=https://datasheet.ciiva.com/169/product-169683.pdf, ComponentLink1URL=https://datasheet.ciiva.com/169/product-169683.pdf, ComponentLink2Description=https://datasheet.ciiva.com:443/pdfs/VipMasterIC/IC/TAIY/TAIY-S-A0009103435/TAIY-S-A0009103038-1.pdf?src-supplier=IHS+Markit, ComponentLink2URL=https://datasheet.ciiva.com:443/pdfs/VipMasterIC/IC/TAIY/TAIY-S-A0009103435/TAIY-S-A0009103038-1.pdf?src-supplier=IHS+Markit, ComponentLink3Description=https://datasheet.ciiva.com/30051/25tmk105bj104kv-f-30051094.pdf?src-supplier=Onlinecomponents.com, ComponentLink3URL=https://datasheet.ciiva.com/30051/25tmk105bj104kv-f-30051094.pdf?src-supplier=Onlinecomponents.com, ComponentLink4Description=https://datasheet.ciiva.com/15922/28tmk105bj104kv-f-15922315.pdf?src-supplier=Onlinecomponents.com, ComponentLink4URL=https://datasheet.ciiva.com/15922/28tmk105bj104kv-f-15922315.pdf?src-supplier=Onlinecomponents.com, ComponentLink5Description=https://datasheet.ciiva.com/131/tmk105bj104kv-f-ss-131420.pdf?src-supplier=Digi-Key, ComponentLink5URL=https://datasheet.ciiva.com/131/tmk105bj104kv-f-ss-131420.pdf?src-supplier=Digi-Key, ComponentLink6Description=https://datasheet.ciiva.com/22768/1693457-22768649.pdf?src-supplier=Farnell, ComponentLink6URL=https://datasheet.ciiva.com/22768/1693457-22768649.pdf?src-supplier=Farnell, Depth=0.5mm, Halogen Free="Halogen Free", Height=0.5mm, Lead Free="Lead Free", Length=1mm, Mount="Surface Mount", Number of Pins=2, Packaging="Tape and Reel", REACH SVHC="No SVHC", RoHS=Yes, Supplier 1=Digi-Key, Termination=SMD/SMT, Thickness=0.022inch, Voltage Rating=25V, Voltage Rating (DC)=25V, Weight=2.3E-05oz, Width=0.5mm
  C10: Pricing 1="1=0.10000, 10=0.04000, 50=0.02180, 100=0.01780, 500=0.01270, 1000=0.00998, 2500=0.00908, 5000=0.00835 (USD)", Stock 1=21430567
  C14 C15 C18 C20 C23 C25 C27: Pricing 1="1=0.10000, 10=0.04400, 50=0.02400, 100=0.01960, 500=0.01398, 1000=0.01098, 2500=0.00998, 5000=0.00918 (USD)", Stock 1=21960903
C11: library part C-0402(1005), "Ceramic Capacitor, Multilayer, Ceramic, 50V, 10% +Tol, 10% -Tol, C0G, 30ppm/Cel TC, 0.000001uF, Surface Mount, 0402", Capacitor Type=Ceramic, Manufacturer=Murata, Manufacturer Part Number=GCQ1555C1H1R0BB01D, Max Operating Temperature=125°C, Min Operating Temperature=-55°C, Negative Tolerance=10%, Package Shape=Rectangular, Rated DC Voltage (URdc)=50V, Supplier Part Number 1=490-GCQ1555C1H1R0BB01DCT-ND, Temperature Characteristics Code=C0G, Capacitance=1pF, Category="Ceramic Capacitors", ComponentLink1Description=https://datasheet.ciiva.com:443/pdfs/VipMasterIC/IC/MURE/MURE-S-A0004442191/MURE-S-A0004444577-1.pdf?src-supplier=IHS+Markit, ComponentLink1URL=https://datasheet.ciiva.com:443/pdfs/VipMasterIC/IC/MURE/MURE-S-A0004442191/MURE-S-A0004444577-1.pdf?src-supplier=IHS+Markit, ComponentLink2Description=http://search.murata.co.jp/Ceramy/image/img/A01X/G101/ENG/GCQ1555C1H1R0BB01-01.pdf?src-supplier=Digi-Key, ComponentLink2URL=http://search.murata.co.jp/Ceramy/image/img/A01X/G101/ENG/GCQ1555C1H1R0BB01-01.pdf?src-supplier=Digi-Key, Dielectric Material=Ceramic, Mount="Surface Mount", Multilayer=Yes, Number of Pins=2, Packaging="Tape and Reel", Positive Tolerance=10%, Pricing 1="1=0.33000, 10=0.22600, 50=0.15100, 100=0.12830, 500=0.09056, 1000=0.07923, 2500=0.07546, 5000=0.06980 (USD)", REACH SVHC=Yes, Reference Standard=AEC-Q200, RoHS=Yes, RoHS Compliant=Yes, Size Code=0402, Stock 1=7250, Supplier 1=Digi-Key, Termination=Wraparound
C12: library part C-0402(1005)
C13 C17 C19 C22 C24 C26: library part C-0402(1005), "Ceramic Capacitor, Multilayer, Ceramic, 6.3V, 20% +Tol, 20% -Tol, X5R, 15% TC, 1uF, Surface Mount, 0402", Case Code (Imperial)=0402, Case Code (Metric)=1005, Dielectric=X5R, Manufacturer=Yageo, Manufacturer Part Number=CC0402MRX5R5BB105, Max Operating Temperature=85°C, Min Operating Temperature=-55°C, Package Quantity=1, Resistor Type=Ceramic, Supplier Part Number 1=311-1441-1-ND, Tolerance=20%, Voltage Rating=6.3V, Capacitance=1uF, Case/Package=0402, Category="Ceramic Capacitors", ComponentLink1Description=https://datasheet.ciiva.com/169/product-169683.pdf, ComponentLink1URL=https://datasheet.ciiva.com/169/product-169683.pdf, ComponentLink2Description=https://datasheet.ciiva.com:443/pdfs/VipMasterIC/IC/YAGO/YAGO-S-A0006851646/YAGO-S-A0006851646-1.pdf?src-supplier=IHS+Markit, ComponentLink2URL=https://datasheet.ciiva.com:443/pdfs/VipMasterIC/IC/YAGO/YAGO-S-A0006851646/YAGO-S-A0006851646-1.pdf?src-supplier=IHS+Markit, ComponentLink3Description=https://datasheet.ciiva.com/176/mlccorderingcode-176806.pdf?src-supplier=Digi-Key, ComponentLink3URL=https://datasheet.ciiva.com/176/mlccorderingcode-176806.pdf?src-supplier=Digi-Key, ComponentLink4Description=https://datasheet.ciiva.com/176/mlccorderingcode-176807.pdf?src-supplier=Digi-Key, ComponentLink4URL=https://datasheet.ciiva.com/176/mlccorderingcode-176807.pdf?src-supplier=Digi-Key, ComponentLink5Description=https://datasheet.ciiva.com/176/mlccorderingcode-176808.pdf?src-supplier=Digi-Key, ComponentLink5URL=https://datasheet.ciiva.com/176/mlccorderingcode-176808.pdf?src-supplier=Digi-Key, Depth=0.5mm, Dissipation Factor=10%, Halogen Free="Halogen Free", Height=0.5mm, Lead Free="Lead Free", Length=1mm, Mount="Surface Mount", Number of Pins=2, Packaging="Tape and Reel", Pricing 1="1=0.12000, 10=0.08500, 50=0.04860, 100=0.04020, 500=0.02818, 1000=0.02333, 2500=0.02172, 5000=0.01987 (USD)", RoHS=Yes, Stock 1=4097, Supplier 1=Digi-Key, Termination=SMD/SMT, Thickness=0.022inch, Voltage Rating (DC)=6.3V, Width=0.5mm
C16 C21: library part C-0402(1005), "___ OHM ___ mW 0402(1005) SMD", ComponentLink1Description=https://datasheet.ciiva.com/169/product-169683.pdf, ComponentLink1URL=https://datasheet.ciiva.com/169/product-169683.pdf
C28: library part C-0402(1005), "Ceramic Capacitor, Multilayer, Ceramic, 50V, 10% +Tol, 10% -Tol, X7R, 15% TC, 0.047uF, Surface Mount, 0402", Capacitor Type=Ceramic, Manufacturer=Murata, Manufacturer Part Number=GCM155R71H473KE02D, Max Operating Temperature=125°C, Min Operating Temperature=-55°C, Negative Tolerance=10%, Package Shape=Rectangular, Package Style=SMTMeter, Rated DC Voltage (URdc)=50V, Supplier Part Number 1=490-13297-1-ND, Temperature Characteristics Code=X7R, Capacitance=47nF, Category="Ceramic Capacitors", ComponentLink1Description=https://datasheet.ciiva.com/169/product-169683.pdf, ComponentLink1URL=https://datasheet.ciiva.com/169/product-169683.pdf, ComponentLink2Description=https://datasheet.ciiva.com:443/pdfs/VipMasterIC/IC/MURE/MURE-S-A0004370842/MURE-S-A0004372843-1.pdf?src-supplier=IHS+Markit, ComponentLink2URL=https://datasheet.ciiva.com:443/pdfs/VipMasterIC/IC/MURE/MURE-S-A0004370842/MURE-S-A0004372843-1.pdf?src-supplier=IHS+Markit, ComponentLink3Description=http://www.mouser.com/ds/2/281/c03e-806517.pdf?src-supplier=Mouser, ComponentLink3URL=http://www.mouser.com/ds/2/281/c03e-806517.pdf?src-supplier=Mouser, ComponentLink4Description=http://www.murata.com/~/media/webrenewal/support/library/catalog/products/capacitor/mlcc/c03e.ashx?src-supplier=Digi-Key, ComponentLink4URL=http://www.murata.com/~/media/webrenewal/support/library/catalog/products/capacitor/mlcc/c03e.ashx?src-supplier=Digi-Key, ComponentLink5Description=http://search.murata.co.jp/Ceramy/image/img/A01X/G101/ENG/GCM155R71H473KE02-01.pdf?src-supplier=Digi-Key, ComponentLink5URL=http://search.murata.co.jp/Ceramy/image/img/A01X/G101/ENG/GCM155R71H473KE02-01.pdf?src-supplier=Digi-Key, ComponentLink6Description=http://search.murata.co.jp/Ceramy/image/img/A01X/partnumbering_e_02.pdf?src-supplier=Digi-Key, ComponentLink6URL=http://search.murata.co.jp/Ceramy/image/img/A01X/partnumbering_e_02.pdf?src-supplier=Digi-Key, Dielectric Material=Ceramic, Height=0.55mm, JESD-609 Code=e3, Length=1mm, Mount="Surface Mount", Multilayer=Yes, Number of Pins=2, Packaging="Tape and Reel", Positive Tolerance=10%, Pricing 1="1=0.10000, 10=0.05300, 50=0.02900, 100=0.02370, 500=0.01694, 1000=0.01331, 2500=0.01210, 5000=0.01113 (USD)", REACH SVHC=Yes, Reference Standard=AEC-Q200, RoHS=Yes, RoHS Compliant=Yes, Size Code=0402, Stock 1=809, Supplier 1=Digi-Key, Terminal Finish=Nickel, Termination=Wraparound, Width=0.5mm
C29: library part C-0402(1005), "Ceramic Capacitor, Non-polarized, Multilayer, Ceramic, 10V, 20% +Tol, 20% -Tol, X5R, 15% TC, 10uF, Surface Mount, 0402", Capacitor Type=Ceramic, Manufacturer="Kyocera AVX", Manufacturer Part Number=0402ZD106MAT2A, Max Operating Temperature=85°C, Min Operating Temperature=-55°C, Negative Tolerance=20%, Package Shape=Rectangular, Rated DC Voltage (URdc)=10V, Supplier Part Number 1=478-10052-1-ND, Temperature Characteristics Code=X5R, Capacitance=10uF, Category="Ceramic Capacitors", ComponentLink1Description=https://datasheet.ciiva.com/169/product-169683.pdf, ComponentLink1URL=https://datasheet.ciiva.com/169/product-169683.pdf, ComponentLink2Description=https://datasheet.ciiva.com:443/pdfs/VipMasterIC/IC/AVXC/AVXC-S-A0009640604/AVXC-S-A0009640604-1.pdf?src-supplier=IHS+Markit, ComponentLink2URL=https://datasheet.ciiva.com:443/pdfs/VipMasterIC/IC/AVXC/AVXC-S-A0009640604/AVXC-S-A0009640604-1.pdf?src-supplier=IHS+Markit, ComponentLink3Description=http://datasheets.avx.com/cx5r.pdf?src-supplier=Digi-Key, ComponentLink3URL=http://datasheets.avx.com/cx5r.pdf?src-supplier=Digi-Key, ComponentLink4Description=http://catalogs.avx.com/SurfaceMount.pdf?src-supplier=Digi-Key, ComponentLink4URL=http://catalogs.avx.com/SurfaceMount.pdf?src-supplier=Digi-Key, Dielectric Material=Ceramic, JESD-609 Code=e3, Mount="Surface Mount", Multilayer=Yes, Number of Pins=2, Packaging="Tape and Reel", Positive Tolerance=20%, Pricing 1="1=0.85000, 10=0.62400, 50=0.49900, 100=0.42770, 500=0.33858, 1000=0.28512, 2500=0.26730, 5000=0.24948 (USD)", RoHS=No, Size Code=0402, Stock 1=111382, Supplier 1=Digi-Key, Terminal Finish=Nickel, Termination=Wraparound
C32: library part C-0402(1005), "Ceramic Capacitor, Multilayer, Ceramic, 6.3V, 20% +Tol, 20% -Tol, X5R, 15% TC, 4.7uF, Surface Mount, 0402", Capacitor Type=Ceramic, Manufacturer=Murata, Manufacturer Part Number=GRM155R60J475ME87J, Max Operating Temperature=85°C, Min Operating Temperature=-55°C, Negative Tolerance=20%, Package Shape=Rectangular, Package Style=SMTMeter, Rated DC Voltage (URdc)=6.3V, Supplier Part Number 1=490-18211-1-ND, Temperature Characteristics Code=X5R, Capacitance=4.7uF, Category="Ceramic Capacitors", ComponentLink1Description=https://datasheet.ciiva.com/169/product-169683.pdf, ComponentLink1URL=https://datasheet.ciiva.com/169/product-169683.pdf, ComponentLink2Description=https://datasheet.ciiva.com:443/pdfs/VipMasterIC/IC/MURE/MURE-S-A0004362469/MURE-S-A0004364141-1.pdf?src-supplier=IHS+Markit, ComponentLink2URL=https://datasheet.ciiva.com:443/pdfs/VipMasterIC/IC/MURE/MURE-S-A0004362469/MURE-S-A0004364141-1.pdf?src-supplier=IHS+Markit, ComponentLink3Description=https://search.murata.co.jp/Ceramy/image/img/A01X/G101/ENG/GRM155R60J475ME87-01.pdf?src-supplier=Digi-Key, ComponentLink3URL=https://search.murata.co.jp/Ceramy/image/img/A01X/G101/ENG/GRM155R60J475ME87-01.pdf?src-supplier=Digi-Key, Dielectric Material=Ceramic, Height=0.5mm, JESD-609 Code=e3, Length=1mm, Mount="Surface Mount", Multilayer=Yes, Number of Pins=2, Packaging="Tape and Reel", Positive Tolerance=20%, Pricing 1="1=0.15000, 10=0.10500, 50=0.05980, 100=0.04950, 500=0.03472, 1000=0.02875, 2500=0.02676, 5000=0.02448 (USD)", REACH SVHC=Yes, RoHS=Yes, RoHS Compliant=Yes, Size Code=0402, Stock 1=105828, Supplier 1=Digi-Key, Terminal Finish=Nickel, Termination=Wraparound, Width=0.5mm
C33: library part C-0402(1005), "Ceramic Capacitor, Multilayer, Ceramic, 50V, 10% +Tol, 10% -Tol, X7R, 15% TC, 0.0068uF, Surface Mount, 0402", Capacitor Type=Ceramic, Manufacturer=Murata, Manufacturer Part Number=GCM155R71H682KA55D, Max Operating Temperature=125°C, Min Operating Temperature=-55°C, Negative Tolerance=10%, Package Shape=Rectangular, Package Style=SMTMeter, Rated DC Voltage (URdc)=50V, Supplier Part Number 1=490-11152-1-ND, Temperature Characteristics Code=X7R, Capacitance=6.8nF, Category="Ceramic Capacitors", ComponentLink1Description=https://datasheet.ciiva.com/169/product-169683.pdf, ComponentLink1URL=https://datasheet.ciiva.com/169/product-169683.pdf, ComponentLink2Description=https://datasheet.ciiva.com:443/pdfs/VipMasterIC/IC/MURE/MURE-S-A0004370842/MURE-S-A0004371992-1.pdf?src-supplier=IHS+Markit, ComponentLink2URL=https://datasheet.ciiva.com:443/pdfs/VipMasterIC/IC/MURE/MURE-S-A0004370842/MURE-S-A0004371992-1.pdf?src-supplier=IHS+Markit, ComponentLink3Description=https://datasheet.ciiva.com/163/s0717e-163461.pdf?src-supplier=Digi-Key, ComponentLink3URL=https://datasheet.ciiva.com/163/s0717e-163461.pdf?src-supplier=Digi-Key, Dielectric Material=Ceramic, Height=0.55mm, JESD-609 Code=e3, Length=1mm, Mount="Surface Mount", Multilayer=Yes, Number of Pins=2, Packaging="Tape and Reel", Positive Tolerance=10%, Pricing 1="1=0.10000, 10=0.04500, 50=0.02460, 100=0.02020, 500=0.01440, 1000=0.01131, 2500=0.01028, 5000=0.00946 (USD)", REACH SVHC=Yes, Reference Standard=AEC-Q200, RoHS=Yes, RoHS Compliant=Yes, Size Code=0402, Stock 1=86177, Supplier 1=Digi-Key, Terminal Finish=Nickel, Termination=Wraparound, Width=0.5mm
D1: library part LED_0402(1005), "Single Color LED, Super Bright Orange, Water Clear, 0.8mm", Case Code (Imperial)=0402, Case Code (Metric)=1005, Forward Current=20mA, Forward Voltage=2.1V, Lens Color=Clear, Manufacturer=Kingbright, Manufacturer Part Number=APHHS1005SECK, Max Operating Temperature=85°C, Min Operating Temperature=-40°C, Package Quantity=2000, Supplier Part Number 1=754-1103-1-ND, Case/Package=0402, Category=LEDs, Color=Orange, ComponentLink1Description=https://datasheet.ciiva.com:443/pdfs/VipMasterIC/IC/KNGB/KNGBS06640/KNGBS06640-1.pdf?src-supplier=IHS+Markit, ComponentLink1URL=https://datasheet.ciiva.com:443/pdfs/VipMasterIC/IC/KNGB/KNGBS06640/KNGBS06640-1.pdf?src-supplier=IHS+Markit, ComponentLink2Description=https://datasheet.ciiva.com/2114/aphhs1005seck-2114149.pdf?src-supplier=Digi-Key, ComponentLink2URL=https://datasheet.ciiva.com/2114/aphhs1005seck-2114149.pdf?src-supplier=Digi-Key, ComponentLink3Description=https://datasheet.ciiva.com/4688/aphhs1005seck-36485-4688716.pdf?src-supplier=Mouser, ComponentLink3URL=https://datasheet.ciiva.com/4688/aphhs1005seck-36485-4688716.pdf?src-supplier=Mouser, ComponentLink4Description=https://datasheet.ciiva.com/2114/aphhs1005seck-2114150.pdf?src-supplier=Digi-Key, ComponentLink4URL=https://datasheet.ciiva.com/2114/aphhs1005seck-2114150.pdf?src-supplier=Digi-Key, ComponentLink5Description=https://datasheet.ciiva.com/2114/aphhs1005seck-2114151.pdf?src-supplier=Digi-Key, ComponentLink5URL=https://datasheet.ciiva.com/2114/aphhs1005seck-2114151.pdf?src-supplier=Digi-Key, ComponentLink6Description=https://datasheet.ciiva.com/16412/aphhs1005seck-16412186.pdf?src-supplier=Future+Electronics, ComponentLink6URL=https://datasheet.ciiva.com/16412/aphhs1005seck-16412186.pdf?src-supplier=Future+Electronics, Dominant Wavelength=601nm, Height=0.6mm, Illumination Color=Orange, Lead Free="Lead Free", Length=1mm, Lens Style=Clear,Flat, Luminous Intensity=240mcd, Mount="Surface Mount", Number of LEDs=1, Number of Pins=2, Packaging="Tape and Reel", Pricing 1="1=0.50000, 10=0.35400, 100=0.20650, 500=0.14160, 1000=0.11800 (USD)", RoHS=Yes, Stock 1=18062, Supplier 1=Digi-Key, Test Current=20mA, Viewing Angle=120°, Wavelength=601nm, Width=0.5mm
D2: library part LED_0402(1005), "Single Color LED, Hyper Red, Water Clear, 0.8mm", Case Code (Imperial)=0402, Case Code (Metric)=1005, Forward Current=20mA, Forward Voltage=1.95V, Lens Color=Clear, Manufacturer=Kingbright, Manufacturer Part Number=APHHS1005SURCK, Max Operating Temperature=85°C, Min Operating Temperature=-40°C, Package Quantity=2000, Supplier Part Number 1=754-1104-1-ND, Case/Package=0402, Category=LEDs, Color=Red, ComponentLink1Description=https://datasheet.ciiva.com:443/pdfs/VipMasterIC/IC/KBEC/KBEC-S-A0008947180/KBEC-S-A0008958151-1.pdf?src-supplier=IHS+Markit, ComponentLink1URL=https://datasheet.ciiva.com:443/pdfs/VipMasterIC/IC/KBEC/KBEC-S-A0008947180/KBEC-S-A0008958151-1.pdf?src-supplier=IHS+Markit, ComponentLink2Description=https://datasheet.ciiva.com/4689/aphhs1005surck-32322-4689068.pdf?src-supplier=Mouser, ComponentLink2URL=https://datasheet.ciiva.com/4689/aphhs1005surck-32322-4689068.pdf?src-supplier=Mouser, ComponentLink3Description=https://datasheet.ciiva.com/2114/aphhs1005surck-2114140.pdf?src-supplier=Digi-Key, ComponentLink3URL=https://datasheet.ciiva.com/2114/aphhs1005surck-2114140.pdf?src-supplier=Digi-Key, ComponentLink4Description=https://datasheet.ciiva.com/14603/70062833-14603899.pdf?src-supplier=Allied+Electronics, ComponentLink4URL=https://datasheet.ciiva.com/14603/70062833-14603899.pdf?src-supplier=Allied+Electronics, ComponentLink5Description=https://datasheet.ciiva.com/2114/aphhs1005surck-2114142.pdf?src-supplier=Digi-Key, ComponentLink5URL=https://datasheet.ciiva.com/2114/aphhs1005surck-2114142.pdf?src-supplier=Digi-Key, ComponentLink6Description=https://datasheet.ciiva.com/2114/aphhs1005surck-2114141.pdf?src-supplier=Digi-Key, ComponentLink6URL=https://datasheet.ciiva.com/2114/aphhs1005surck-2114141.pdf?src-supplier=Digi-Key, Dominant Wavelength=630nm, Height=0.6mm, Illumination Color=Red, Lead Free="Lead Free", Length=1mm, Lens Style=Clear,Flat, Luminous Intensity=220mcd, Mount="Surface Mount", Number of LEDs=1, Number of Pins=2, Packaging="Tape and Reel", Pricing 1="1=0.50000, 10=0.35400, 100=0.20650, 500=0.14160, 1000=0.11800 (USD)", RoHS=Yes, Stock 1=12156, Supplier 1=Digi-Key, Test Current=20mA, Viewing Angle=120°, Wavelength=635nm, Width=0.5mm
D3: library part LED_0402(1005), "Single Color LED, Super Bright Yellow, Water Clear, 0.8mm", Case Code (Imperial)=0402, Case Code (Metric)=1005, Forward Current=20mA, Forward Voltage=2V, Lens Color=Clear, Manufacturer=Kingbright, Manufacturer Part Number=APHHS1005SYCK, Max Operating Temperature=85°C, Min Operating Temperature=-40°C, Package Quantity=2000, Supplier Part Number 1=754-1105-1-ND, Case/Package=0402, Category=LEDs, Color=Yellow, ComponentLink1Description=https://datasheet.ciiva.com:443/pdfs/VipMasterIC/IC/KBEC/KBEC-S-A0008947180/KBEC-S-A0008958019-1.pdf?src-supplier=IHS+Markit, ComponentLink1URL=https://datasheet.ciiva.com:443/pdfs/VipMasterIC/IC/KBEC/KBEC-S-A0008947180/KBEC-S-A0008958019-1.pdf?src-supplier=IHS+Markit, ComponentLink2Description=https://datasheet.ciiva.com/4688/aphhs1005syck-76875-4688936.pdf?src-supplier=Mouser, ComponentLink2URL=https://datasheet.ciiva.com/4688/aphhs1005syck-76875-4688936.pdf?src-supplier=Mouser, ComponentLink3Description=https://datasheet.ciiva.com/2114/aphhs1005syck-2114041.pdf?src-supplier=Digi-Key, ComponentLink3URL=https://datasheet.ciiva.com/2114/aphhs1005syck-2114041.pdf?src-supplier=Digi-Key, ComponentLink4Description=https://datasheet.ciiva.com/14603/70062834-14603866.pdf?src-supplier=Allied+Electronics, ComponentLink4URL=https://datasheet.ciiva.com/14603/70062834-14603866.pdf?src-supplier=Allied+Electronics, ComponentLink5Description=https://datasheet.ciiva.com/2114/aphhs1005syck-2114043.pdf?src-supplier=Digi-Key, ComponentLink5URL=https://datasheet.ciiva.com/2114/aphhs1005syck-2114043.pdf?src-supplier=Digi-Key, ComponentLink6Description=https://datasheet.ciiva.com/16412/aphhs1005syck-16412188.pdf?src-supplier=Future+Electronics, ComponentLink6URL=https://datasheet.ciiva.com/16412/aphhs1005syck-16412188.pdf?src-supplier=Future+Electronics, Dominant Wavelength=590nm, Height=0.6mm, Illumination Color=Yellow, Lead Free="Lead Free", Length=1mm, Lens Style=Clear,Flat, Luminous Intensity=150mcd, Mount="Surface Mount", Number of LEDs=1, Number of Pins=2, Packaging="Tape and Reel", Pricing 1="1=0.44000, 10=0.31200, 100=0.18200, 500=0.12480, 1000=0.10400 (USD)", RoHS=Yes, Stock 1=1790, Supplier 1=Digi-Key, Test Current=20mA, Viewing Angle=120°, Width=0.5mm
E1: "RF/Microwave Antenna, 2400MHz Min, 2500MHz Max", Manufacturer=Johanson, Manufacturer Part Number=2450AT18B100E, Max Operating Temperature=85°C, Min Operating Temperature=-40°C, Operating Frequency-Max=2.5MHz, Operating Frequency-Min=2.4MHz, Supplier Part Number 1=712-1006-1-ND, Category="RF Antennas", Characteristic Impedance=50R, ComponentLink1Description=https://datasheet.ciiva.com:443/pdfs/VipMasterIC/IC/JOHA/JOHAS00625/JOHAS00625-1.pdf?src-supplier=IHS+Markit, ComponentLink1URL=https://datasheet.ciiva.com:443/pdfs/VipMasterIC/IC/JOHA/JOHAS00625/JOHAS00625-1.pdf?src-supplier=IHS+Markit, ComponentLink2Description=https://datasheet.ciiva.com/24025/antenna-2450at18b100-242422-24025839.pdf?src-supplier=Mouser, ComponentLink2URL=https://datasheet.ciiva.com/24025/antenna-2450at18b100-242422-24025839.pdf?src-supplier=Mouser, ComponentLink3Description=https://datasheet.ciiva.com/1124/1318299-1124918.pdf?src-supplier=Element14, ComponentLink3URL=https://datasheet.ciiva.com/1124/1318299-1124918.pdf?src-supplier=Element14, Construction=COMPONENT, JESD-609 Code=e3, Pricing 1="1=0.56000, 10=0.49500, 25=0.46520, 100=0.37950, 250=0.35252, 500=0.30000, 1000=0.24000 (USD)", RF/Microwave Device Type=ANTENNA-OTHER, RoHS=Yes, Supplier 1=Digi-Key, Terminal Finish=Tin